# Altium PCB Advanced Clock.PcbDoc (part 1 of 7)
Units mil, origin at the board's own origin, x right, y up, seen from the top; angles counter-clockwise.
Board outline 3854 x 3880 mil, 2 copper layers (Top Layer, Bottom Layer); 117 components, 90 nets, 504 pads, 209 vias.
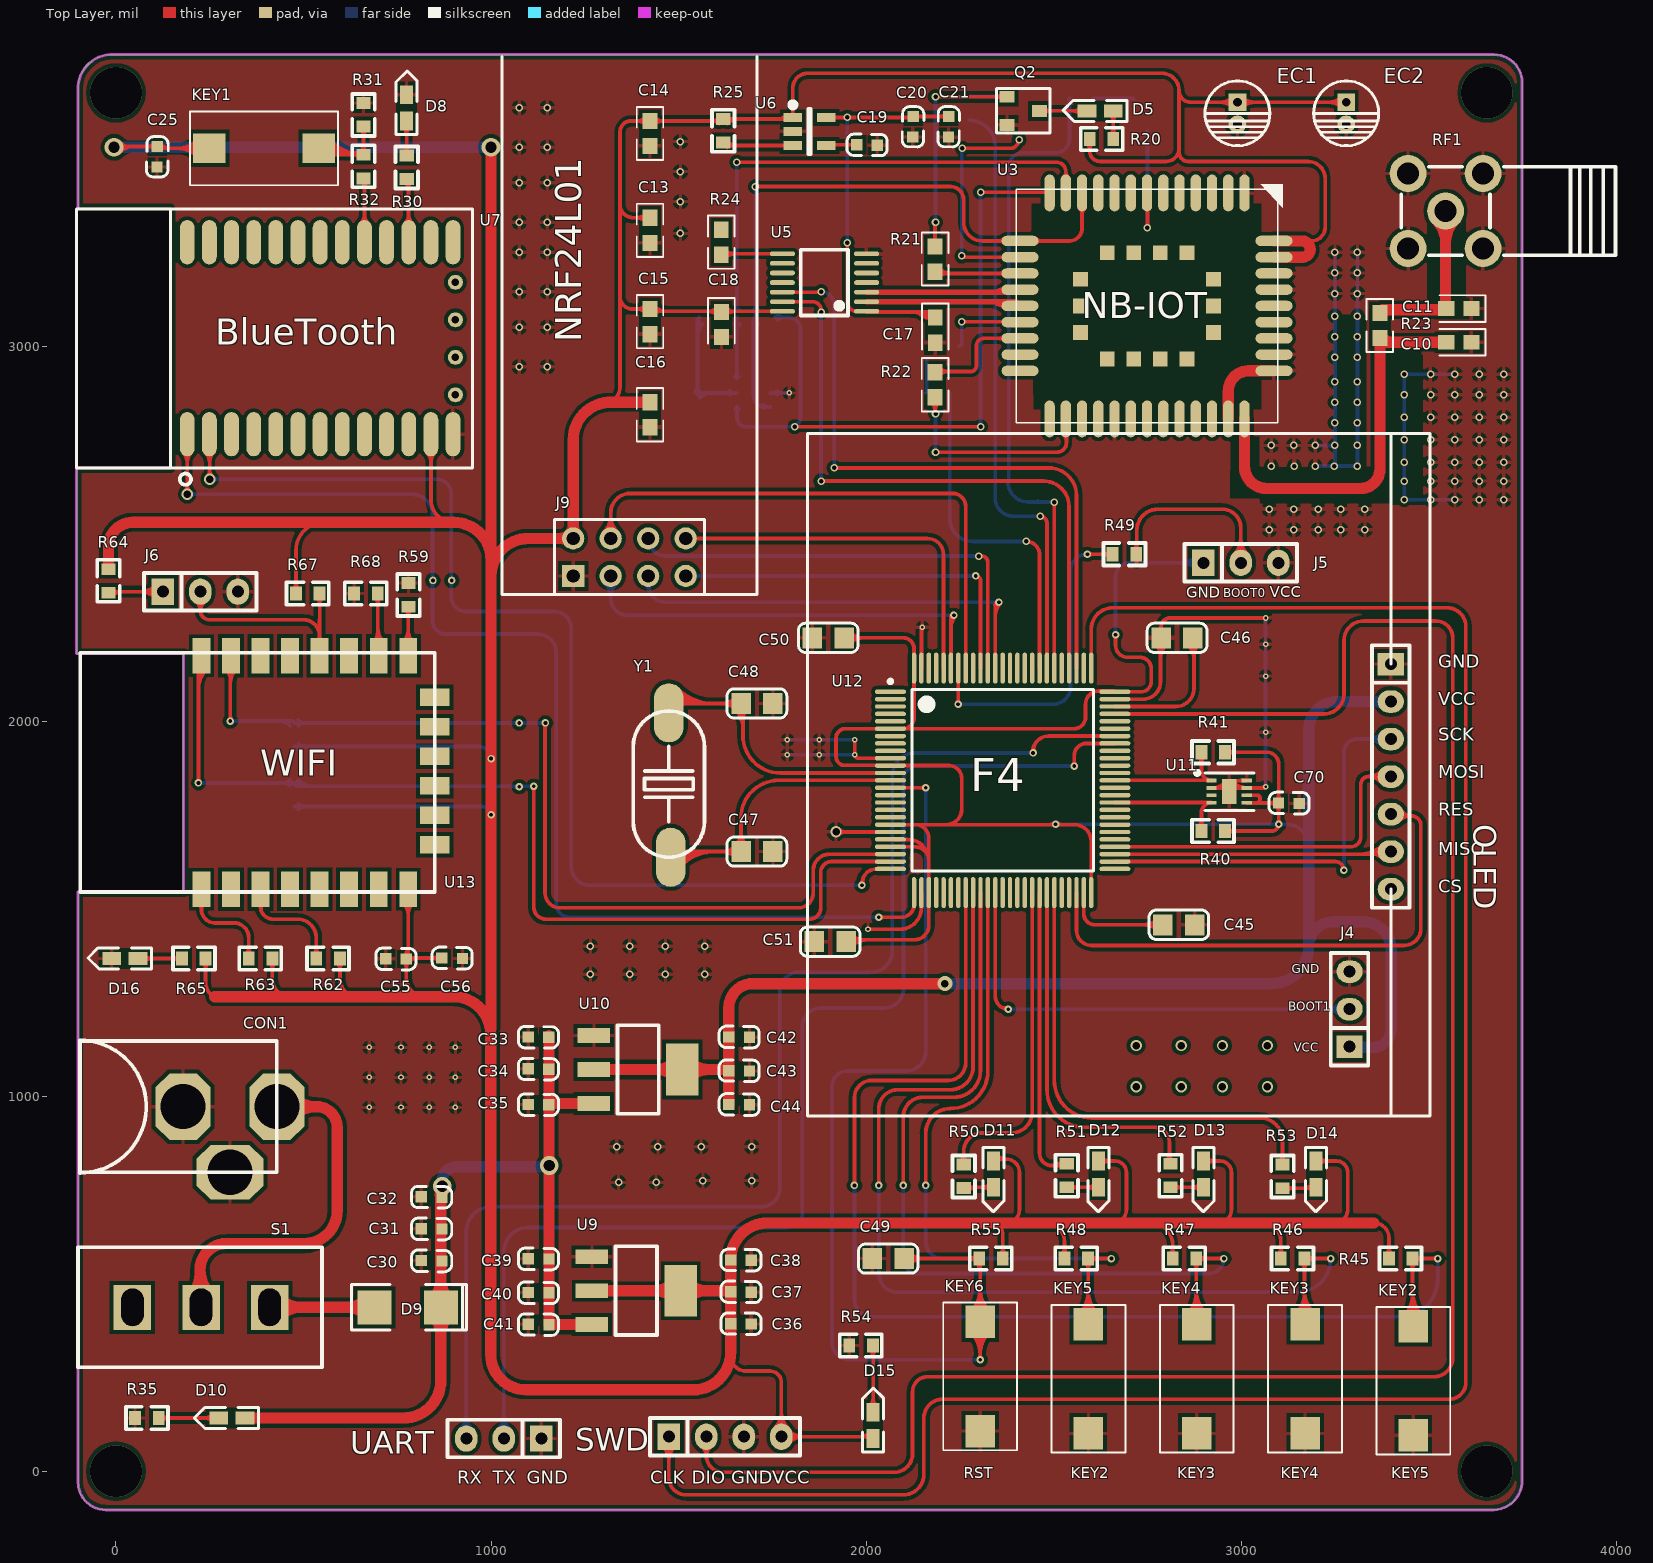
[diagram p0: Top Layer view]
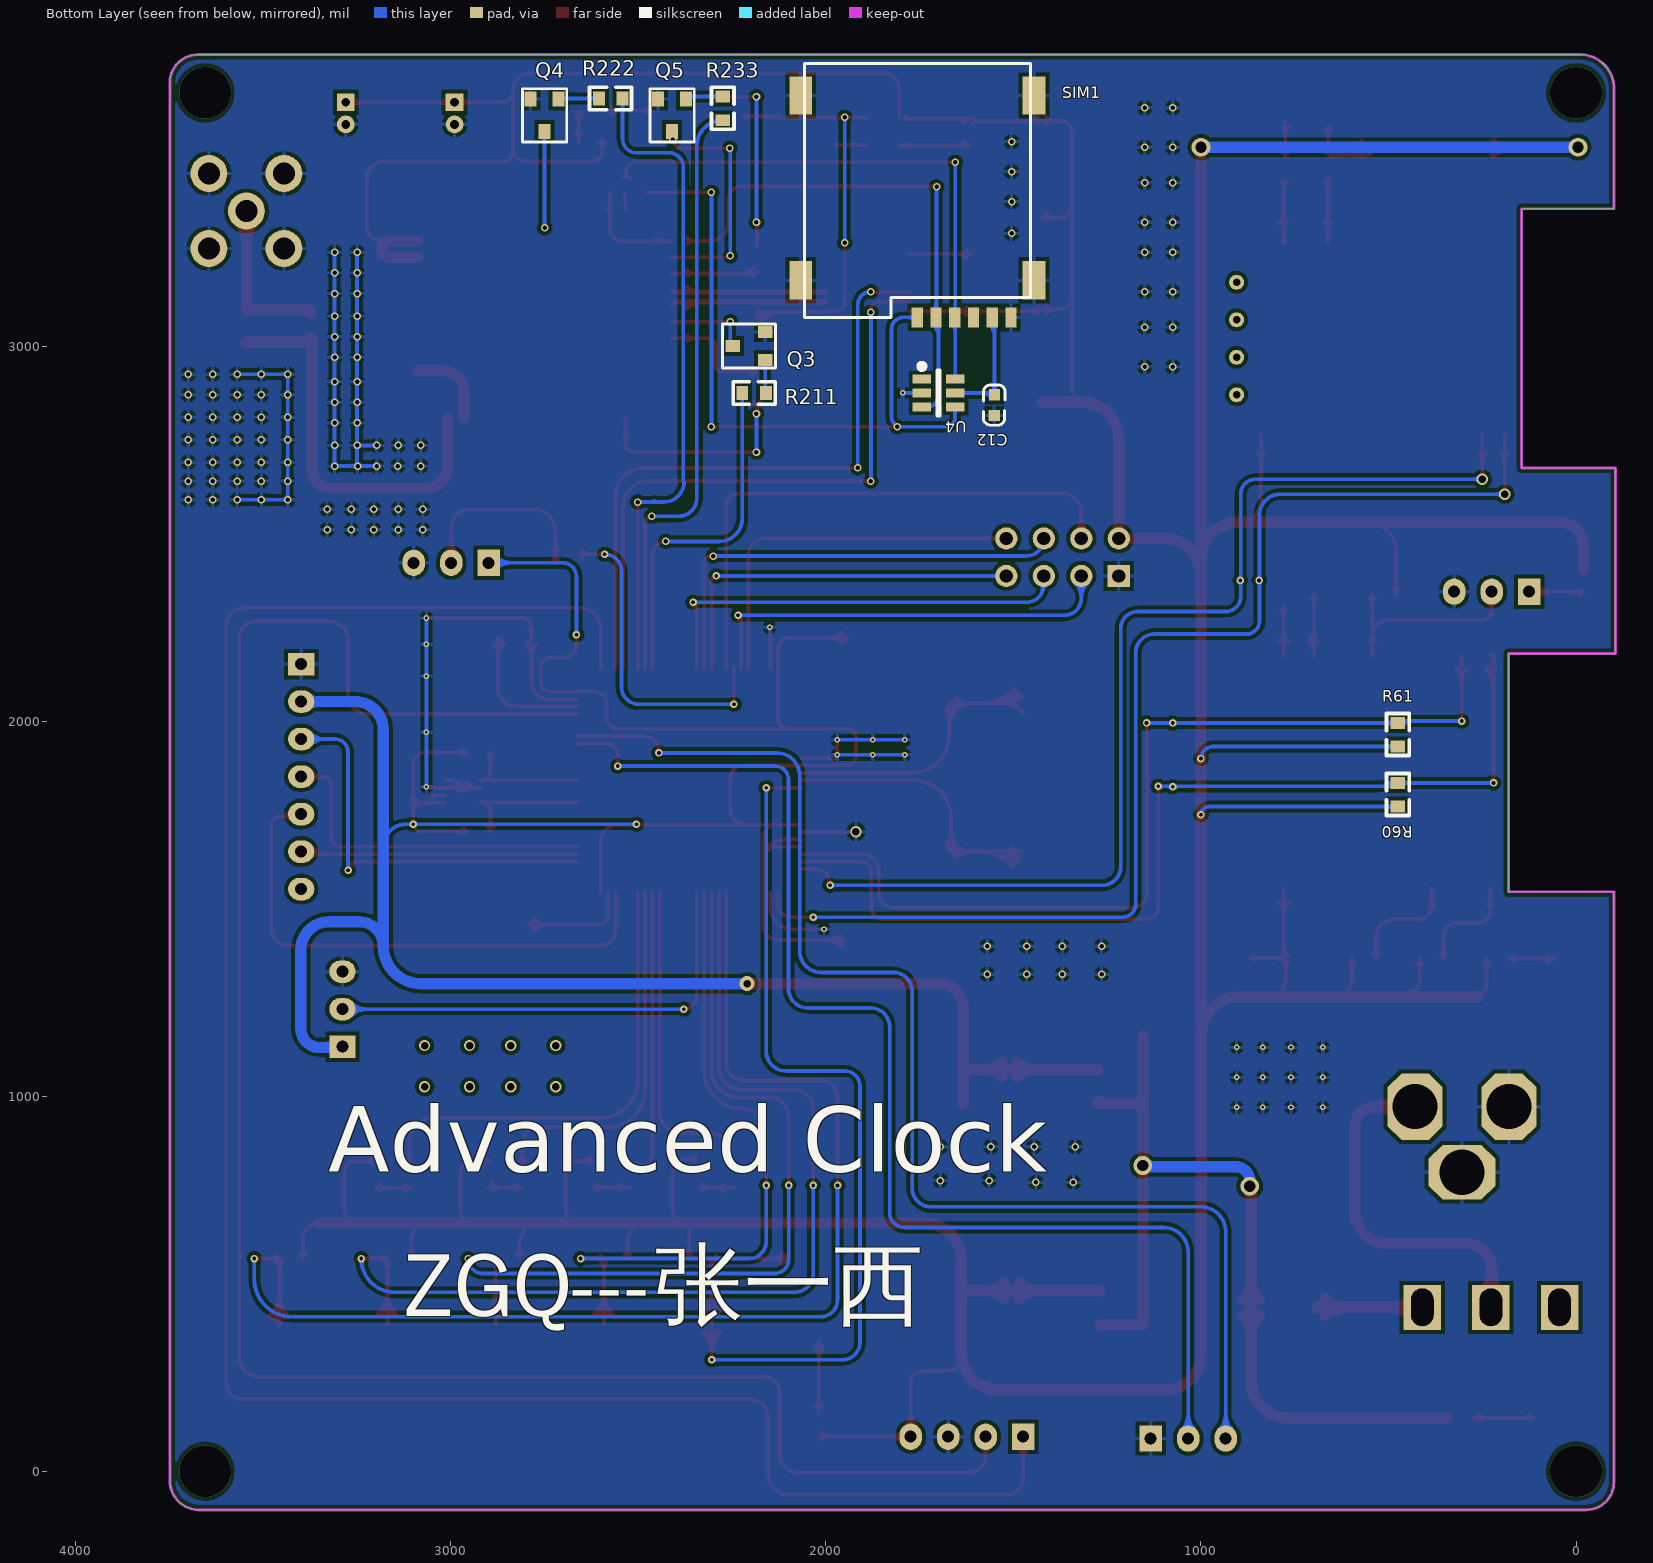
[diagram p1: Bottom Layer view, seen from below]

## Layer stack, top to bottom
Top Solder: solder mask 0.4, Solder Resist, Dk 3.5
Top Layer: signal copper 1.4
Dielectric 1: dielectric 12.6, FR-4, Dk 4.8
Bottom Layer: signal copper 1.4
Bottom Solder: solder mask 0.4, Solder Resist, Dk 3.5

## Board outline
-101,-29.41 -101,1545 180,1545 180,2180 -105,2180 -105,2675 145,2675 145,3365 144,3366 -101,3366 -101,3682 cw(c-11,3687) -16,3777 3674,3777 cw(c3674,3702) 3749,3702 3749,-23.06 3748.96,-23.06 cw(c3671.41,-25.41) 3673.76,-102.96 3673.76,-103 -27.41,-103 cw(c-27.41,-29.41)

## Design rules (kind name [scope] priority, off if disabled: settings)
Clearance [All] p1: gap=6
HoleSize [All] p1: absolutevalues=TRUE maxlimit=1000 minlimit=1 maxpercent=80.000 minpercent=20.000
MinimumSolderMaskSliver [All] p1: minsoldermaskwidth=0
PolygonConnect [All] p1: connectstyle=Relief reliefconductorwidth=10 reliefentries=4 polygonreliefangle="90 Angle" airgapwidth=10
RoutingVias [All] p1: holewidth=23.62 width=39.37 viastyle="Through Hole" minholewidth=28 minwidth=50 maxholewidth=28 maxwidth=50
SilkToSilkClearance [All] p1: silktosilkclearance=0
SilkToSolderMaskClearance [IsPad] p1: minsilkscreentomaskgap=0 clearancetoexposedcopper=TRUE
SolderMaskExpansion [All] p1: expansion=4
Width Width_1 [All] p1: maxlimit=30 minlimit=10 preferedwidth=10
Width Width_3v3_2 [InNet('VCC3V3_2')] p2: maxlimit=50 minlimit=10 preferedwidth=30
Width Width_3v3 [InNet('VCC3V3')] p3: maxlimit=50 minlimit=10 preferedwidth=30
Width [InNet('VCC5')] p4: maxlimit=50 minlimit=7.87 preferedwidth=30
25 further rules are at their usual default settings.

## Classes and differential pairs
component class STM32F407: C45 C46 C47 C48 C49 C50 C51 D11 D12 D13 D14 D15 J4 J5 KEY2 KEY3 KEY4 KEY5 KEY6 OLED R45 R46 R47 R48 R49 R50 R51 R52 R53 R54 R55 SWD U12 UART Y1
component class BT: C25 D8 KEY1 R30 R31 R32 U7
component class HT: C70 R40 R41 U11
component class NB: C10 C11 C12 C13 C14 C15 C16 C17 C18 C19 C20 C21 D5 EC1 EC2 Q2 Q3 Q4 Q5 R20 R21 R22 R23 R24 R25 R211 R222 R233 RF1 SIM1 U3 U4 U5 U6
component class NRF: J9
component class Power: C30 C31 C32 C33 C34 C35 C36 C37 C38 C39 C40 C41 C42 C43 C44 CON1 D9 D10 R35 S1 U9 U10
component class WIFI: C55 C56 D16 J6 R59 R60 R61 R62 R63 R64 R65 R67 R68 U13

## Components (designator, comment, footprint, x,y, rotation, side; value= is the part's Value field where it differs from the comment)
C10 "0.1uF" CC1608-0603 3580,3010 r180 top
C11 "0.1uF" CC1608-0603 3580,3100 r180 top
C12 "0.1uF" 0603C 1550,2870 r270 bottom
C13 "1uF" CR1608-0603 1424,3308.67 r90 top
C14 "1uF" CR1608-0603 1424,3567 r90 top
C15 "100nF" CR1608-0603 1424,3065.33 r90 top
C16 "100nF" CR1608-0603 1424,2817 r90 top
C17 "0.1uF" CC1608-0603 2184,3042 r270 top
C18 "0.1uF" CC1608-0603 1614,3057 r270 top
C19 "10nF" 0603C 2030,3535 r180 top
C20 "10nF" 0603C 2124,3557 r90 top
C21 "1uF" 0603C 2219,3557 r90 top
C25 "1uF" 0603C 109,3477 r90 top
C30 "1uF" 0603C 814,562 r0 top
C31 "1uF" 0603C 814,647 r0 top
C32 "100nF" 0603C 814,732 r0 top
C33 "100nF" 0603C 1098.79,1158.35 r0 top
C34 "1uF" 0603C 1098.79,1073.35 r0 top
C35 "1uF" 0603C 1098.79,978.35 r0 top
C36 "1uF" 0603C 1694,392 r180 top
C37 "1uF" 0603C 1694,477 r180 top
C38 "100nF" 0603C 1694,562 r180 top
C39 "100nF" 0603C 1099,567 r0 top
C40 "1uF" 0603C 1099,477 r0 top
C41 "1uF" 0603C 1099,392 r0 top
C42 "1uF" 0603C 1689.21,1156.65 r180 top
C43 "1uF" 0603C 1689.21,1066.65 r180 top
C44 "100nF" 0603C 1689.21,976.65 r180 top
C45 "4700pF" C0805 2834,1457 r90 top
C46 "4700pF" C0805 2829,2222 r270 top
C47 "22pF" C0805 1709,1652 r90 top
C48 "22pF" C0805 1709,2047 r90 top
C49 "100nF" C0805 2059,567 r270 top
C50 "4700pF" C0805 1899,2222 r90 top
C51 "4700pF" C0805 1904,1412 r90 top
C55 "1uF" 0603C 719,1367 r0 top
C56 "1uF" 0603C 924,1367 r180 top
C70 "100nF" 0603C 3155,1780 r180 top
CON1 "DC_JACK2.5mm" JACK 429,972 r0 top
D5 "LED" LED-0603G 2659,3627 r180 top
D8 "LED" LED-0603G 775,3600 r90 top
D9 "IN5822" TVS 689,437 r0 top
D10 "LED" LED-0603B 344,142 r180 top
D11 "LED" LED-0603B 2339,827 r270 top
D12 "LED" LED-0603B 2619,827 r270 top
D13 "LED" LED-0603B 2899,827 r270 top
D14 "LED" LED-0603B 3199,827 r270 top
D15 "LED" LED-0603B 2019,87 r90 top
D16 "LED" LED-0603G 59,1367 r180 top
EC1 "100uF" DIP-EC1.5X4X8 2990,3650 r270 top
EC2 "100uF" DIP-EC1.5X4X8 3280,3650 r270 top
J4 "Pin HDR1X3" "Pin HDR1X3/2.54mm-S" 3289,1132 r180 top
J5 "Pin HDR1X3" "Pin HDR1X3/2.54mm-S" 2899,2422 r90 top
J6 "Pin HDR1X3" "Pin HDR1X3/2.54mm-S" 125,2345 r90 top
J9 "Pin HDR2X4" "Pin HDR2X4/2.54mm-S" 1219,2387 r0 top
KEY1 "KEY" KEY 249,3527 r0 top
KEY2 "KEY" KEY 3459,387 r270 top
KEY3 "KEY" KEY 3170.25,392 r270 top
KEY4 "KEY" KEY 2881.5,392 r270 top
KEY5 "KEY" KEY 2592.75,392 r270 top
KEY6 "KEY" KEY 2304,107 r90 top
OLED "Pin HDR1X7" "Pin HDR1X7/2.54mm-S" 3399,2152 r0 top (schematic designator "Female HDR1X2")
Q2 "S9013" SOT-23 2419,3627 r90 top
Q3 "S9013" SOT-23 2205,3000 r270 bottom
Q4 "S9013" SOT-23 2750,3615 r180 bottom
Q5 "S9013" SOT-23 2410,3615 r180 bottom
R20 "4.7K" 0603R 2659,3552 r180 top
R21 "4.7K" CR1608-0603 2184,3232 r90 top
R22 "4.7K" CR1608-0603 2184,2897 r90 top
R23 "0R" CR1608-0603 3370,3055 r90 top
R24 "51K" CR1608-0603 1614,3277 r90 top
R25 "10K" 0603R 1619,3605.18 r270 top
R30 "1K" 0603R 775,3445 r90 top
R31 "10K" 0603R 660,3585 r90 top
R32 "220" 0603R 660,3510 r270 top
R35 "1K" 0603R 114,142 r180 top
R40 "10K" 0603R 2894,1707 r0 top
R41 "10K" 0603R 2894,1917 r0 top
R45 "10K" 0603R 3394,567 r0 top
R46 "10K" 0603R 3105.67,567 r0 top
R47 "10K" 0603R 2817.33,567 r0 top
R48 "10K" 0603R 2529,567 r0 top
R49 "10K" 0603R 2720,2445 r180 top
R50 "1K" 0603R 2260,755 r90 top
R51 "1K" 0603R 2535,757 r90 top
R52 "1K" 0603R 2811.5,757 r90 top
R53 "1K" 0603R 3110,754.5 r90 top
R54 "1K" 0603R 1955,335 r0 top
R55 "10K" 0603R 2301.5,567 r0 top
R59 "0R" 0603R 780,2305 r90 top
R60 "5.6K" 0603R 475,1835 r270 bottom
R61 "5.6K" 0603R 475,1995 r270 bottom
R62 "1K" 0603R 534,1367 r0 top
R63 "1K" 0603R 354,1367 r0 top
R64 "5.6K" 0603R -20,2405 r270 top
R65 "512" 0603R 239,1367 r180 top
R67 "1K" 0603R 480,2340 r0 top
R68 "1K" 0603R 635,2340 r0 top
R211 "4.7K" 0603R 2160,2875 r0 bottom
R222 "4.7K" 0603R 2605,3660 r180 bottom
R233 "4.7K" 0603R 2275,3665 r270 bottom
RF1 "KH-SMA-K514-N" SMA-5RF 3645,3460 r180 top
S1 "Key" Key 44,437 r90 top
SIM1 "SIM-002-A6" SIM-002-T6 1445,3175 r0 bottom locked
SWD "STLINK" "Pin HDR1X4/2.54mm-S" 1474,92 r90 top (schematic designator J11)
U3 "BC26" BC26 2749,3107 r270 top locked
U4 "SRV05-04" SOT23-6 1700,2875 r180 bottom
U5 "TXS0104E" TSSOP-14 1889,3182 r90 top
U6 "SGM2019-1.8YN5G/TR" SOT23-5 1849,3572 r0 top
U7 "HC08" HC08 190,2765 r90 top
U9 "AMS117-3.3" SOT-223 1269,572 r270 top
U10 "AMS117-3.3" SOT-223 1274.21,1161.65 r270 top
U11 "STH_DIS" DFN-8_L2.5-W2.5-P0.50-BL-EP 2969,1812 r0 top
U12 "STM32F407VET6" LQFP100_M 2364,1842 r0 top
U13 "ESP8266" ESP8266 779,2182 r270 top
UART "USART" "Pin HDR1X3/2.54mm-S" 1134,87 r270 top (schematic designator J10)
Y1 "8MHz" 49SMD 1474,1832 r270 top

## Footprints (in the part's own frame and the unit in brackets; to place one, negate y for a bottom-side part, rotate by r counter-clockwise, add the part's x,y. Pads: shape width x height; smd on the part's side, far side on the other; paste and mask are expansions set on the pad)
49SMD [mm]
  oval 4x2 smd: 1(-4.826,0) 2(4.953,0.127)
  silkscreen extent -4.95,-2.41 4.95,2.41
0603C [mil]
  rect 30x30 smd: 1(0.21,-0.35) 2(55.21,-1.35)
  silkscreen extent -26,-30 81,28, body extent -1,-15 62,17, height 12
0603R [mm]
  rect 0.8x0.965 smd: 1(0,0) 2(1.6,0)
  silkscreen extent -0.64,-0.76 2.21,0.76, body extent -0.04,-0.41 1.56,0.41, height 0.45
BC26 [mm]
  oval 2.5x0.7 smd: 1(-7.65,6.6) 2(-7.65,5.5) 3(-7.65,4.4) 4(-7.65,3.3) 5(-7.65,2.2) 6(-7.65,1.1) 7(-7.65,0) 8(-7.65,-1.1) 9(-7.65,-2.2) 10(-7.65,-3.3) 11(-7.65,-4.4) 12(-7.65,-5.5) 13(-7.65,-6.6) 23(7.65,-6.6) 24(7.65,-5.5) 25(7.65,-4.4) 26(7.65,-3.3) 27(7.65,-2.2) 28(7.65,-1.1) 29(7.65,0) 30(7.65,1.1) 31(7.65,2.2) 32(7.65,3.3) 33(7.65,4.4) 34(7.65,5.5) 35(7.65,6.6)
  oval 0.7x2.5 smd: 14(-4.4,-8.6) 15(-3.3,-8.6) 16(-2.2,-8.6) 17(-1.1,-8.6) 18(0,-8.6) 19(1.1,-8.6) 20(2.2,-8.6) 21(3.3,-8.6) 22(4.4,-8.6) 36(4.4,8.6) 37(3.3,8.6) 38(2.2,8.6) 39(1.1,8.6) 40(0,8.6) 41(-1.1,8.6) 42(-2.2,8.6) 43(-3.3,8.6) 44(-4.4,8.6)
  rect 1x1 smd: 45(-3.6,2.7) 46(-3.6,0.9) 47(-3.6,-0.9) 48(-3.6,-2.7) 49(-1.8,-4.5) 50(0,-4.5) 51(1.8,-4.5) 52(3.6,-2.7) 53(3.6,-0.9) 54(3.6,0.9) 55(3.6,2.7) 56(1.8,4.5) 57(0,4.5) 58(-1.8,4.5)
  silkscreen extent -8.25,-8.85 7.9,9.2
C0805 [mil]
  rect 56x52 smd: 1(0,-42.5) 2(0,42.5)
  silkscreen extent -39,-79 39,80
CC1608-0603 [mm]
  rect 1.1x1 smd: 1(-0.857,0.004) 2(0.843,0.004)
  silkscreen extent -1.81,-0.9 1.29,0.9
CR1608-0603 [mm]
  rect 1.1x1 smd: 1(-0.857,0.004) 2(0.843,0.004)
  silkscreen extent -1.81,-0.9 1.79,0.9
DFN-8_L2.5-W2.5-P0.50-BL-EP [mm]
  rect 0.7x0.25 smd: 1(-1.228,0.748) 2(-1.228,0.248) 3(-1.228,-0.252) 4(-1.228,-0.752) 5(1.172,-0.752) 6(1.172,-0.252) 7(1.172,0.248) 8(1.172,0.748)
  rect 1x1.7 smd: 9(-0.015,0.013)
  silkscreen extent -2.31,-1.27 1.65,1.39
DIP-EC1.5X4X8 [mm]
  rect 1.2x1.2 hole 0.6: 1(0,0)
  round 1.2 hole 0.6: 2(1.5,0)
  silkscreen extent -1.45,-2.2 2.95,2.2, body extent -1.26,-1.97 2.76,2.03, height 8.04
ESP8266 [mm]
  rect 2.4x1.2 smd: 1(0.2,0) 2(0.2,-2) 3(0.2,-4) 4(0.2,-6) 5(0.2,-8) 6(0.2,-10) 7(0.2,-12) 8(0.2,-14) 9(16,-14) 10(16,-12) 11(16,-10) 12(16,-8) 13(16,-6) 14(16,-4) 15(16,-2) 16(16,0)
  rect 1.2x2 smd: 17(13,1.8) 18(11,1.8) 19(9,1.8) 20(7,1.8) 21(5,1.8) 22(3,1.8)
  silkscreen extent 0,-22.2 16.2,1.8
HC08 [mm]
  oval 3x1 smd: 1(0,0) 2(0,-1.5) 3(0,-3) 4(0,-4.5) 5(0,-6) 6(0,-7.5) 7(0,-9) 8(0,-10.5) 9(0,-12) 10(0,-13.5) 11(0,-15) 12(0,-16.5) 13(0,-18) 14(13,-18) 15(13,-16.5) 16(13,-15) 17(13,-13.5) 18(13,-12) 19(13,-10.5) 20(13,-9) 21(13,-7.5) 22(13,-6) 23(13,-4.5) 24(13,-3) 25(13,-1.5) 26(13,0)
  round 1.016 hole 0.508: 27(2.667,-18.161) 28(5.207,-18.161) 29(7.747,-18.161) 30(10.287,-18.161)
  silkscreen extent -3.43,-19.3 15.24,7.49
JACK [mil]
  oct 145.98x177.48 hole 120.42: 1(0,0) 2(-250,0)
  oct 177.48x145.98 hole 120.42: 3(-125,-175)
  silkscreen extent -525,-177 0,177
KEY [mm]
  rect 2.2x2 smd: 1(0,0) 2(7.4,0)
  silkscreen extent -1.3,-2.5 8.7,2.5, body extent -0.41,-1.86 7.59,1.84, height 2.64
Key [mil]
  rect 120x100 hole 60 slot 100 at 0 deg: 1(0,0) 2(0,-183) 3(0,-366)
  silkscreen extent -160,-505 160,145
LED-0603B [mil]
  rect 50x35 smd: A(0,0.26) K(70,0.26)
  silkscreen extent -36,-28 135,28, body extent 4,-15 66,17, height 24
LED-0603G [mil]
  rect 50x35 smd: A(0,0.26) K(70,0.26)
  silkscreen extent -36,-28 134,28, body extent 4,-15 66,17, height 24
LQFP100_M [mm] "Thin QFP, 100-Leads, Body 14x14mm, Pitch 0.5mm, IPC Low Density"
  oval 2.1x0.3 smd: 1(-7.6,6) 2(-7.6,5.5) 3(-7.6,5) 4(-7.6,4.5) 5(-7.6,4) 6(-7.6,3.5) 7(-7.6,3) 8(-7.6,2.5) 9(-7.6,2) 10(-7.6,1.5) 11(-7.6,1) 12(-7.6,0.5) 13(-7.6,0) 14(-7.6,-0.5) 15(-7.6,-1) 16(-7.6,-1.5) 17(-7.6,-2) 18(-7.6,-2.5) 19(-7.6,-3) 20(-7.6,-3.5) 21(-7.6,-4) 22(-7.6,-4.5) 23(-7.6,-5) 24(-7.6,-5.5) 25(-7.6,-6) 51(7.6,-6) 52(7.6,-5.5) 53(7.6,-5) 54(7.6,-4.5) 55(7.6,-4) 56(7.6,-3.5) 57(7.6,-3) 58(7.6,-2.5) 59(7.6,-2) 60(7.6,-1.5) 61(7.6,-1) 62(7.6,-0.5) 63(7.6,0) 64(7.6,0.5) 65(7.6,1) 66(7.6,1.5) 67(7.6,2) 68(7.6,2.5) 69(7.6,3) 70(7.6,3.5) 71(7.6,4) 72(7.6,4.5) 73(7.6,5) 74(7.6,5.5) 75(7.6,6)
  oval 0.3x2.1 smd: 26(-6,-7.6) 27(-5.5,-7.6) 28(-5,-7.6) 29(-4.5,-7.6) 30(-4,-7.6) 31(-3.5,-7.6) 32(-3,-7.6) 33(-2.5,-7.6) 34(-2,-7.6) 35(-1.5,-7.6) 36(-1,-7.6) 37(-0.5,-7.6) 38(0,-7.6) 39(0.5,-7.6) 40(1,-7.6) 41(1.5,-7.6) 42(2,-7.6) 43(2.5,-7.6) 44(3,-7.6) 45(3.5,-7.6) 46(4,-7.6) 47(4.5,-7.6) 48(5,-7.6) 49(5.5,-7.6) 50(6,-7.6) 76(6,7.6) 77(5.5,7.6) 78(5,7.6) 79(4.5,7.6) 80(4,7.6) 81(3.5,7.6) 82(3,7.6) 83(2.5,7.6) 84(2,7.6) 85(1.5,7.6) 86(1,7.6) 87(0.5,7.6) 88(0,7.6) 89(-0.5,7.6) 90(-1,7.6) 91(-1.5,7.6) 92(-2,7.6) 93(-2.5,7.6) 94(-3,7.6) 95(-3.5,7.6) 96(-4,7.6) 97(-4.5,7.6) 98(-5,7.6) 99(-5.5,7.6) 100(-6,7.6)
  silkscreen extent -7.72,-6.15 6.15,6.82, body extent -7,-7 7,7, height 1.6
"Pin HDR1X3/2.54mm-S" [mil]
  rect 70x60 hole 32: 1(0,0)
  oval 70x60 hole 32: 2(0,-100) 3(0,-200)
  silkscreen extent -50,-250 50,50, body extent -50,-250 50,50, height 336
"Pin HDR1X4/2.54mm-S" [mil]
  rect 70x60 hole 32: 1(0,0)
  oval 70x60 hole 32: 2(0,-100) 3(0,-200) 4(0,-300)
  silkscreen extent -50,-350 50,50, body extent -50,-350 50,50, height 336
"Pin HDR1X7/2.54mm-S" [mil]
  rect 70x60 hole 32: 1(0,0)
  oval 70x60 hole 32: 2(0,-100) 3(0,-200) 4(0,-300) 5(0,-400) 6(0,-500) 7(0,-600)
  silkscreen extent -50,-650 50,50, body extent -50,-650 50,50, height 336
"Pin HDR2X4/2.54mm-S" [mm] "Connector; Header; 4x2 Position"
  rect 1.5x1.5 hole 0.9: 1(0,0)
  round 1.5 hole 0.9: 2(0,2.54) 3(2.54,0) 4(2.54,2.54) 5(5.08,0) 6(5.08,2.54) 7(7.62,0) 8(7.62,2.54)
  silkscreen extent -1.27,-1.27 8.89,3.81, body extent -1.27,-1.27 8.89,3.81, height 7.58
SIM-002-T6 [mm]
  rect 0.762x1.35 smd: 1(2.83,2.505) 2(5.37,2.505) 3(7.91,2.505) 5(1.56,2.505) 6(4.1,2.505) 7(6.64,2.505)
  rect 1.55x2.6 smd: 11(0,0) 12(0,-12.52) 13(15.8,0) 14(15.8,-12.52)
  silkscreen extent 0.25,-14.68 15.55,2.52
SMA-5RF [mm]
  round 2.5 hole 1.5: 1(0,0) 2(0,5.08) 3(5.08,5.08) 4(5.08,0) 5(2.54,2.54)
  silkscreen extent -8.96,-0.46 5.54,5.54
SOT23-5 [mm]
  rect 1.25x0.6 smd: 1(-1.125,0.95) 2(-1.125,0) 3(-1.125,-0.95) 4(1.125,-0.95) 5(1.125,0.95)
  silkscreen extent -1.25,-1.55 0.1,1.92
SOT23-6 [mm]
  rect 1.25x0.6 smd: 1(-1.125,0.95) 2(-1.125,0) 3(-1.125,-0.95) 4(1.125,-0.95) 5(1.143,0) 6(1.143,0.95)
  silkscreen extent -1.25,-1.55 0.1,1.92
SOT-23 [mm]
  rect 0.8x1 smd: 1(0.95,1.1) 2(-0.95,1.1) 3(0,-1.1)
  silkscreen extent -1.5,-1.8 1.5,1.8, body extent -1.5,-1.02 1.52,0.99, height 0.8
SOT-223 [mm]
  rect 1x2.2 smd: 1(0,0) 2(2.3,0) 3(4.6,0)
  rect 3.5x2.2 smd: 4(2.3,6)
  silkscreen extent -0.7,1.6 5.3,4.4, body extent -0.94,-0.49 5.54,6.49, height 1.64
TSSOP-14 [mm]
  oval 0.32x1.7 smd: 1(-2.275,-2.85) 2(-1.625,-2.85) 3(-0.975,-2.85) 4(-0.325,-2.85) 5(0.325,-2.85) 6(0.975,-2.85) 7(1.625,-2.85) 8(1.625,2.85) 9(0.975,2.85) 10(0.325,2.85) 11(-0.325,2.85) 12(-0.975,2.85) 13(-1.625,2.85) 14(-2.275,2.85)
  silkscreen extent -2.55,-1.6 1.9,1.6
TVS [mm]
  rect 2.3x2.3 smd: 1(0,0) 2(4.5,0)
  silkscreen extent -1.55,-1.55 6.22,1.55

## Part data
C10 C11 C12 C17 C18: library part "Cap Semi", "Capacitor (Semiconductor SIM Model)"
C13 C14 C15 C16: library part Cap_2.2uF_X7R_10%_0805, "Capacitor,2.2uF,16V, X7R,10%,0805,YAGEO"
C19 C20 C21 C25 C30 C31 C32 C33 C34 C35 C36 C37 C38 C39 C40 C41 C42 C43 C44 C70: library part CAP, "无极性电容"
C45 C46 C47 C48 C49 C50 C51: library part Cap0805, "Capacitor"
C55 C56: library part C
CON1: library part DC_JACK
D9: library part "Diode 1N4007", "1 Amp General Purpose Rectifier"
EC1 EC2: library part DIP_ECAP, "直插电解电容"
KEY6: library part KEY_1
Q2 Q3 Q4 Q5: library part NPN-normal, "Transistor"
R20 R21 R22 R23 R24 R211 R222 R233: library part Res2, "Resistor"
R25 R30 R31 R32 R35 R40 R41 R45 R46 R47 R48 R49 R50 R51 R52 R53 R54 R55 R59: library part RES
R60 R61 R62 R63 R64 R65 R67 R68: library part R
SIM1: library part SIM-002-T6
SWD: library part "Pin HDR1X4"
U5: library part TSSOP14
U12: "ARM Cortex-M4 32b MCU+FPU, 210DMIP, 512 kB Flash, 192+4 kB RAM, Camera, 82 I/Os, 100-pin LQFP, -40 to +85癈, Tray"
UART: library part "Pin HDR1X3"
Y1: library part XTAL, "Crystal Oscillator"

## Free pads (board coordinates)
  round 20 hole 10: 0(1075,1995) 1(1075,1825) 2(895,2375) 3(845,2375)

## Via types
v1: diameter 20, hole 12, Top Layer to Bottom Layer, 133 vias
v2: diameter 20, hole 10, Top Layer to Bottom Layer, 30 vias
v3: diameter 15, hole 7, Top Layer to Bottom Layer, 26 vias
v4: diameter 30, hole 20, Top Layer to Bottom Layer, 11 vias
v5: diameter 138, hole 137.8, Top Layer to Bottom Layer, 4 vias
v6: diameter 50, hole 30, Top Layer to Bottom Layer, 4 vias
v7: diameter 40, hole 20, Top Layer to Bottom Layer, 1 vias

## Nets (pads, with @x,y where several pads share a name; then routed paths per layer and width w, separated by ;. In a path a pad name is that pad's centre, name@x,y a point inside that pad or via, vN(x,y) a via of type N, cw(c..) or ccw(c..) an arc to the next point about the centre after c; other vN are vias at no path point)
BOOT0: J5.2 R49.1 | length 1342.7
  Top Layer w10: R49.1@2712.4,2455.85 ccw(c2690.43,2477.82) 2721.5,2477.82 ; R49.1@2715.2,2432.14 cw(c2710.11,2421.94) 2721.5,2421.94 cw(c2736.59,2421.94) R49.1@2726.9,2433.51 ; 2721.5,2422 2721.5,2508.2 cw(c2778.3,2508.2) 2778.3,2565 2949,2565 cw(c2949,2515) 2999,2515 J5.2@2999,2422 ; 2721.5,2470.57 ccw(c2742.33,2470.57) R49.1@2727.6,2455.85 ; J5.2@2981.32,2444.68 ccw(c2938.64,2487.36) 2999,2487.36 ; J5.2@2981.32,2444.68 ccw(c2938.64,2487.36) 2999,2487.36 ; J5.2@2981.32,2444.68 ccw(c2938.64,2487.36) 2999,2487.36 ; J5.2@2981.32,2444.68 ccw(c2938.64,2487.36) 2999,2487.36 ; J5.2@2981.32,2444.68 ccw(c2938.64,2487.36) 2999,2487.36 ; J5.2@2988.39,2437.61 ccw(c2962.79,2463.21) 2999,2463.21 ; J5.2@2988.39,2437.61 ccw(c2962.79,2463.21) 2999,2463.21 ; J5.2@2988.39,2437.61 ccw(c2962.79,2463.21) 2999,2463.21 ; J5.2@2988.39,2437.61 ccw(c2962.79,2463.21) 2999,2463.21 ; J5.2@2988.39,2437.61 ccw(c2962.79,2463.21) 2999,2463.21 ; 2999,2463.21 ccw(c3035.21,2463.21) J5.2@3009.61,2437.61 ; 2999,2463.21 ccw(c3035.21,2463.21) J5.2@3009.61,2437.61 ; 2999,2463.21 ccw(c3035.21,2463.21) J5.2@3009.61,2437.61 ; 2999,2463.21 ccw(c3035.21,2463.21) J5.2@3009.61,2437.61 ; 2999,2463.21 ccw(c3035.21,2463.21) J5.2@3009.61,2437.61 ; 2999,2487.36 ccw(c3059.36,2487.36) J5.2@3016.68,2444.68 ; 2999,2487.36 ccw(c3059.36,2487.36) J5.2@3016.68,2444.68 ; 2999,2487.36 ccw(c3059.36,2487.36) J5.2@3016.68,2444.68 ; 2999,2487.36 ccw(c3059.36,2487.36) J5.2@3016.68,2444.68 ; 2999,2487.36 ccw(c3059.36,2487.36) J5.2@3016.68,2444.68
BOOT1: J4.2 U12.37 | length 2245.5
  Top Layer w10: U12.37@2344.32,1542.79 2344.32,1266.68 ccw(c2379,1266.68) v2(2379,1232) ; 2367.34,1235.12 cw(c2364.22,1223.46) v2@2374.67,1229.5 ; 2367.34,1235.12 ccw(c2370.46,1246.78) v2@2376.5,1236.33 ; 2367.34,1235.12 cw(c2364.22,1223.46) v2@2374.67,1229.5 ; 2367.34,1235.12 ccw(c2370.46,1246.78) v2@2376.5,1236.33 ; 2367.34,1235.12 cw(c2364.22,1223.46) v2@2374.67,1229.5 ; 2367.34,1235.12 ccw(c2370.46,1246.78) v2@2376.5,1236.33 ; 2367.34,1235.12 cw(c2364.22,1223.46) v2@2374.67,1229.5 ; 2367.34,1235.12 ccw(c2370.46,1246.78) v2@2376.5,1236.33 ; 2367.34,1235.12 cw(c2364.22,1223.46) v2@2374.67,1229.5 ; 2367.34,1235.12 ccw(c2370.46,1246.78) v2@2376.5,1236.33
  Bottom Layer w10: v2(2379,1232) J4.2@3289,1232 ; v2@2382.54,1228.46 cw(c2391.07,1219.93) 2391.07,1232 ; v2@2382.54,1228.46 cw(c2391.07,1219.93) 2391.07,1232 ; v2@2382.54,1228.46 cw(c2391.07,1219.93) 2391.07,1232 ; v2@2382.54,1228.46 cw(c2391.07,1219.93) 2391.07,1232 ; v2@2382.54,1228.46 cw(c2391.07,1219.93) 2391.07,1232 ; v2@2382.54,1228.46 cw(c2391.07,1219.93) 2391.07,1232 ; v2@2382.54,1228.46 cw(c2391.07,1219.93) 2391.07,1232 ; v2@2382.54,1228.46 cw(c2391.07,1219.93) 2391.07,1232 ; v2@2382.54,1235.54 ccw(c2391.07,1244.07) 2391.07,1232 ; v2@2382.54,1235.54 ccw(c2391.07,1244.07) 2391.07,1232 ; v2@2382.54,1235.54 ccw(c2391.07,1244.07) 2391.07,1232 ; v2@2382.54,1235.54 ccw(c2391.07,1244.07) 2391.07,1232 ; v2@2382.54,1235.54 ccw(c2391.07,1244.07) 2391.07,1232 ; v2@2382.54,1235.54 ccw(c2391.07,1244.07) 2391.07,1232 ; v2@2382.54,1235.54 ccw(c2391.07,1244.07) 2391.07,1232 ; v2@2382.54,1235.54 ccw(c2391.07,1244.07) 2391.07,1232 ; 3223.64,1232 cw(c3223.64,1171.64) J4.2@3266.32,1214.32 ; 3223.64,1232 ccw(c3223.64,1292.36) J4.2@3266.32,1249.68 ; 3223.64,1232 cw(c3223.64,1171.64) J4.2@3266.32,1214.32 ; 3223.64,1232 ccw(c3223.64,1292.36) J4.2@3266.32,1249.68 ; 3223.64,1232 cw(c3223.64,1171.64) J4.2@3266.32,1214.32 ; 3223.64,1232 ccw(c3223.64,1292.36) J4.2@3266.32,1249.68 ; 3223.64,1232 cw(c3223.64,1171.64) J4.2@3266.32,1214.32 ; 3223.64,1232 ccw(c3223.64,1292.36) J4.2@3266.32,1249.68 ; 3223.64,1232 cw(c3223.64,1171.64) J4.2@3266.32,1214.32 ; 3223.64,1232 ccw(c3223.64,1292.36) J4.2@3266.32,1249.68 ; 3247.79,1232 cw(c3247.79,1195.79) J4.2@3273.39,1221.39 ; 3247.79,1232 ccw(c3247.79,1268.21) J4.2@3273.39,1242.61 ; 3247.79,1232 cw(c3247.79,1195.79) J4.2@3273.39,1221.39 ; 3247.79,1232 ccw(c3247.79,1268.21) J4.2@3273.39,1242.61 ; 3247.79,1232 cw(c3247.79,1195.79) J4.2@3273.39,1221.39 ; 3247.79,1232 ccw(c3247.79,1268.21) J4.2@3273.39,1242.61 ; 3247.79,1232 cw(c3247.79,1195.79) J4.2@3273.39,1221.39 ; 3247.79,1232 ccw(c3247.79,1268.21) J4.2@3273.39,1242.61 ; 3247.79,1232 cw(c3247.79,1195.79) J4.2@3273.39,1221.39 ; 3247.79,1232 ccw(c3247.79,1268.21) J4.2@3273.39,1242.61
BT_RXD: pad.2 U7.2 U12.25 | length 3912.4
  Top Layer w10: U7.2@249.06,2765 cw(c249.06,2764.06) 250,2764.06 v4(250,2645) ; v2@1989,1567 cw(c2027.78,1567) 2027.78,1605.78 U12.25@2064.79,1605.78 ; U7.2@238.67,2715.25 cw(c211.32,2687.9) 250,2687.9 ; U7.2@238.67,2715.25 cw(c211.32,2687.9) 250,2687.9 ; U7.2@238.67,2715.25 cw(c211.32,2687.9) 250,2687.9 ; U7.2@238.67,2715.25 cw(c211.32,2687.9) 250,2687.9 ; U7.2@238.67,2715.25 cw(c211.32,2687.9) 250,2687.9 ; v4@242.93,2652.07 ccw(c225.86,2669.14) 250,2669.14 ; v4@242.93,2652.07 ccw(c225.86,2669.14) 250,2669.14 ; v4@242.93,2652.07 ccw(c225.86,2669.14) 250,2669.14 ; v4@242.93,2652.07 ccw(c225.86,2669.14) 250,2669.14 ; v4@242.93,2652.07 ccw(c225.86,2669.14) 250,2669.14 ; 250,2669.14 ccw(c274.14,2669.14) v4@257.07,2652.07 ; 250,2669.14 ccw(c274.14,2669.14) v4@257.07,2652.07 ; 250,2669.14 ccw(c274.14,2669.14) v4@257.07,2652.07 ; 250,2669.14 ccw(c274.14,2669.14) v4@257.07,2652.07 ; 250,2669.14 ccw(c274.14,2669.14) v4@257.07,2652.07 ; 250,2692.46 cw(c282.23,2692.46) U7.2@259.44,2715.25 ; 250,2692.46 cw(c282.23,2692.46) U7.2@259.44,2715.25 ; 250,2692.46 cw(c282.23,2692.46) U7.2@259.44,2715.25 ; 250,2692.46 cw(c282.23,2692.46) U7.2@259.44,2715.25 ; 250,2692.46 cw(c282.23,2692.46) U7.2@259.44,2715.25 ; 1991.68,1577.01 ccw(c2007.61,1572.74) v2@1993.33,1564.5 ; 1991.68,1577.01 ccw(c2007.61,1572.74) v2@1993.33,1564.5 ; 1991.68,1577.01 ccw(c2007.61,1572.74) v2@1993.33,1564.5 ; 1991.68,1577.01 ccw(c2007.61,1572.74) v2@1993.33,1564.5 ; 1991.68,1577.01 ccw(c2007.61,1572.74) v2@1993.33,1564.5
  Bottom Layer w10: v4(250,2645) 854,2645 cw(c854,2605) 894,2605 894,2332 ccw(c934,2332) 934,2292 1169,2292 cw(c1169,2247) 1214,2247 1214,1612 ccw(c1264,1612) 1264,1562 v2(1989,1562) ; v4@257.07,2637.93 cw(c274.14,2620.86) 274.14,2645 ; v4@257.07,2637.93 cw(c274.14,2620.86) 274.14,2645 ; v4@257.07,2637.93 cw(c274.14,2620.86) 274.14,2645 ; v4@257.07,2637.93 cw(c274.14,2620.86) 274.14,2645 ; v4@257.07,2637.93 cw(c274.14,2620.86) 274.14,2645 ; v4@257.07,2652.07 ccw(c274.14,2669.14) 274.14,2645 ; v4@257.07,2652.07 ccw(c274.14,2669.14) 274.14,2645 ; v4@257.07,2652.07 ccw(c274.14,2669.14) 274.14,2645 ; v4@257.07,2652.07 ccw(c274.14,2669.14) 274.14,2645 ; v4@257.07,2652.07 ccw(c274.14,2669.14) 274.14,2645 ; 894,2360.51 cw(c909.49,2360.51) pad.2@898.54,2371.46 ; 894,2360.51 cw(c909.49,2360.51) pad.2@898.54,2371.46 ; 894,2360.51 cw(c909.49,2360.51) pad.2@898.54,2371.46 ; 894,2389.49 ccw(c909.49,2389.49) pad.2@898.54,2378.54 ; 894,2389.49 ccw(c909.49,2389.49) pad.2@898.54,2378.54 ; 894,2389.49 ccw(c909.49,2389.49) pad.2@898.54,2378.54 ; 1976.93,1562 cw(c1976.93,1549.93) v2@1985.46,1558.46 ; 1976.93,1562 ccw(c1976.93,1574.07) v2@1985.46,1565.54 ; 1976.93,1562 cw(c1976.93,1549.93) v2@1985.46,1558.46 ; 1976.93,1562 ccw(c1976.93,1574.07) v2@1985.46,1565.54 ; 1976.93,1562 cw(c1976.93,1549.93) v2@1985.46,1558.46 ; 1976.93,1562 ccw(c1976.93,1574.07) v2@1985.46,1565.54 ; 1976.93,1562 cw(c1976.93,1549.93) v2@1985.46,1558.46 ; 1976.93,1562 ccw(c1976.93,1574.07) v2@1985.46,1565.54 ; 1976.93,1562 cw(c1976.93,1549.93) v2@1985.46,1558.46 ; 1976.93,1562 ccw(c1976.93,1574.07) v2@1985.46,1565.54 ; 1976.93,1562 cw(c1976.93,1549.93) v2@1985.46,1558.46 ; 1976.93,1562 ccw(c1976.93,1574.07) v2@1985.46,1565.54 ; 1976.93,1562 cw(c1976.93,1549.93) v2@1985.46,1558.46 ; 1976.93,1562 ccw(c1976.93,1574.07) v2@1985.46,1565.54 ; 1976.93,1562 cw(c1976.93,1549.93) v2@1985.46,1558.46 ; 1976.93,1562 ccw(c1976.93,1574.07) v2@1985.46,1565.54
BT_TXD: pad.3 U7.1 U12.26 | length 4235.7
  Top Layer w10: v4(190,2605) U7.1@190,2765 ; v2(2034,1477) 2094,1477 ccw(c2094,1510.78) 2127.78,1510.78 U12.26@2127.78,1542.79 ; U7.1@179.62,2715.25 cw(c154.55,2690.18) 190,2690.18 ; U7.1@179.62,2715.25 cw(c154.55,2690.18) 190,2690.18 ; U7.1@179.62,2715.25 cw(c154.55,2690.18) 190,2690.18 ; U7.1@179.62,2715.25 cw(c154.55,2690.18) 190,2690.18 ; U7.1@179.62,2715.25 cw(c154.55,2690.18) 190,2690.18 ; v4@182.93,2612.07 ccw(c165.86,2629.14) 190,2629.14 ; v4@182.93,2612.07 ccw(c165.86,2629.14) 190,2629.14 ; v4@182.93,2612.07 ccw(c165.86,2629.14) 190,2629.14 ; v4@182.93,2612.07 ccw(c165.86,2629.14) 190,2629.14 ; v4@182.93,2612.07 ccw(c165.86,2629.14) 190,2629.14 ; 190,2629.14 ccw(c214.14,2629.14) v4@197.07,2612.07 ; 190,2629.14 ccw(c214.14,2629.14) v4@197.07,2612.07 ; 190,2629.14 ccw(c214.14,2629.14) v4@197.07,2612.07 ; 190,2629.14 ccw(c214.14,2629.14) v4@197.07,2612.07 ; 190,2629.14 ccw(c214.14,2629.14) v4@197.07,2612.07 ; 190,2690.18 cw(c225.45,2690.18) U7.1@200.38,2715.25 ; 190,2690.18 cw(c225.45,2690.18) U7.1@200.38,2715.25 ; 190,2690.18 cw(c225.45,2690.18) U7.1@200.38,2715.25 ; 190,2690.18 cw(c225.45,2690.18) U7.1@200.38,2715.25 ; 190,2690.18 cw(c225.45,2690.18) U7.1@200.38,2715.25 ; v2@2037.54,1473.46 cw(c2046.07,1464.93) 2046.07,1477 ; v2@2037.54,1473.46 cw(c2046.07,1464.93) 2046.07,1477 ; v2@2037.54,1473.46 cw(c2046.07,1464.93) 2046.07,1477 ; v2@2037.54,1473.46 cw(c2046.07,1464.93) 2046.07,1477 ; v2@2037.54,1473.46 cw(c2046.07,1464.93) 2046.07,1477 ; v2@2037.54,1473.46 cw(c2046.07,1464.93) 2046.07,1477 ; v2@2037.54,1473.46 cw(c2046.07,1464.93) 2046.07,1477 ; v2@2037.54,1473.46 cw(c2046.07,1464.93) 2046.07,1477 ; v2@2037.54,1480.54 ccw(c2046.07,1489.07) 2046.07,1477 ; v2@2037.54,1480.54 ccw(c2046.07,1489.07) 2046.07,1477 ; v2@2037.54,1480.54 ccw(c2046.07,1489.07) 2046.07,1477 ; v2@2037.54,1480.54 ccw(c2046.07,1489.07) 2046.07,1477 ; v2@2037.54,1480.54 ccw(c2046.07,1489.07) 2046.07,1477 ; v2@2037.54,1480.54 ccw(c2046.07,1489.07) 2046.07,1477 ; v2@2037.54,1480.54 ccw(c2046.07,1489.07) 2046.07,1477 ; v2@2037.54,1480.54 ccw(c2046.07,1489.07) 2046.07,1477
  Bottom Layer w10: v4(190,2605) 788.27,2605 cw(c788.27,2549.27) 844,2549.27 844,2267 ccw(c879,2267) 879,2232 1124,2232 cw(c1124,2182) 1174,2182 1174,1512 ccw(c1209,1512) 1209,1477 v2(2034,1477) ; v4@197.07,2597.93 cw(c214.14,2580.86) 214.14,2605 ; v4@197.07,2597.93 cw(c214.14,2580.86) 214.14,2605 ; v4@197.07,2597.93 cw(c214.14,2580.86) 214.14,2605 ; v4@197.07,2597.93 cw(c214.14,2580.86) 214.14,2605 ; v4@197.07,2597.93 cw(c214.14,2580.86) 214.14,2605 ; v4@197.07,2612.07 ccw(c214.14,2629.14) 214.14,2605 ; v4@197.07,2612.07 ccw(c214.14,2629.14) 214.14,2605 ; v4@197.07,2612.07 ccw(c214.14,2629.14) 214.14,2605 ; v4@197.07,2612.07 ccw(c214.14,2629.14) 214.14,2605 ; v4@197.07,2612.07 ccw(c214.14,2629.14) 214.14,2605 ; 844,2360.51 cw(c859.49,2360.51) pad.3@848.54,2371.46 ; 844,2360.51 cw(c859.49,2360.51) pad.3@848.54,2371.46 ; 844,2360.51 cw(c859.49,2360.51) pad.3@848.54,2371.46 ; 844,2389.49 ccw(c859.49,2389.49) pad.3@848.54,2378.54 ; 844,2389.49 ccw(c859.49,2389.49) pad.3@848.54,2378.54 ; 844,2389.49 ccw(c859.49,2389.49) pad.3@848.54,2378.54 ; 2021.93,1477 cw(c2021.93,1464.93) v2@2030.46,1473.46 ; 2021.93,1477 ccw(c2021.93,1489.07) v2@2030.46,1480.54 ; 2021.93,1477 cw(c2021.93,1464.93) v2@2030.46,1473.46 ; 2021.93,1477 ccw(c2021.93,1489.07) v2@2030.46,1480.54 ; 2021.93,1477 cw(c2021.93,1464.93) v2@2030.46,1473.46 ; 2021.93,1477 ccw(c2021.93,1489.07) v2@2030.46,1480.54 ; 2021.93,1477 cw(c2021.93,1464.93) v2@2030.46,1473.46 ; 2021.93,1477 ccw(c2021.93,1489.07) v2@2030.46,1480.54 ; 2021.93,1477 cw(c2021.93,1464.93) v2@2030.46,1473.46 ; 2021.93,1477 ccw(c2021.93,1489.07) v2@2030.46,1480.54 ; 2021.93,1477 cw(c2021.93,1464.93) v2@2030.46,1473.46 ; 2021.93,1477 ccw(c2021.93,1489.07) v2@2030.46,1480.54 ; 2021.93,1477 cw(c2021.93,1464.93) v2@2030.46,1473.46 ; 2021.93,1477 ccw(c2021.93,1489.07) v2@2030.46,1480.54 ; 2021.93,1477 cw(c2021.93,1464.93) v2@2030.46,1473.46 ; 2021.93,1477 ccw(c2021.93,1489.07) v2@2030.46,1480.54
GND: C10.1 C11.1 C12.2 C13.1 C14.1 C15.1 C16.1 C17.2 C18.2 C19.1 C20.1 C21.1 C25.1 C30.1 C31.1 C32.1 C33.1 C34.1 C35.1 C36.1 C37.1 C38.1 C39.1 C40.1 C41.1 C42.1 C43.1 C44.1 C45.1 C46.1 C47.1 C48.1 C49.1 C50.2 C51.2 C55.1 C56.1 C70.1 CON1.2 CON1.3 D8.K D16.K EC1.2 EC2.2 J4.3 J5.3 J6.3 J9.1 KEY2.2 KEY3.2 KEY4.2 KEY5.2 KEY6.1 OLED.1 Q2.2 Q3.2 Q4.2 Q5.2 R31.2 R35.2 R54.1 R59.2 R68.1 RF1.1 RF1.2 RF1.3 RF1.4 SIM1.5 SIM1.11 SIM1.12 SIM1.13 SIM1.14 SWD.3 U3.1 U3.27 U3.34 U3.36 U3.37 U3.41 U3.42 U4.2 U5.7 U6.2 U7.13 U9.1 U10.1 U11.2 U11.7 U11.8 U11.9 U12.10 U12.20 U12.27 U12.74 U12.99 UART.1 | length 7881.1
  Top Layer w10: v4(1920,1705) ccw(c1920.8,1705) 1920.8,1704.2 U12.20@2064.79,1704.2 ; v3(1970,1950) v3(1970,1910) ccw(c1978.94,1910) 1978.94,1901.06 U12.10@2064.79,1901.06 ; v3(2005,1445) 2090,1445 ccw(c2090,1502.46) 2147.46,1502.46 U12.27@2147.46,1542.79 ; U12.99@2147.46,2141.21 2147.46,2247.46 cw(c2150,2247.46) v3(2150,2250) ; U12.74@2663.21,2058.54 2738.54,2058.54 ccw(c2738.54,2105) 2785,2105 2785,2220.5 cw(c2786.5,2220.5) C46.1@2786.5,2222 2786.5,2251.5 ; U11.2@2920.65,1821.75 2959.16,1821.75 cw(c2959.16,1812.5) U11.9@2968.4,1812.5 ; U11.7@3001.89,1825.21 cw(c2999.99,1818.12) U11.7@3006.35,1821.79 ; U11.8@3015.14,1841.43 2997.33,1841.43 ccw(c2997.33,1812.5) U11.9@2968.4,1812.5 ; v3(3065,1825) cw(c3061.75,1825) 3061.75,1821.75 U11.7@3015.14,1821.75 2977.64,1821.75 ccw(c2977.64,1812.5) U11.9@2968.4,1812.5 ; v3(3065,2275) 2810,2275 ccw(c2810,2251.5) 2786.5,2251.5 ; v4@1927.07,1697.93 cw(c1942.22,1682.78) 1942.22,1704.2 ; v4@1927.07,1697.93 cw(c1942.22,1682.78) 1942.22,1704.2 ; v4@1927.07,1697.93 cw(c1942.22,1682.78) 1942.22,1704.2 ; v4@1927.07,1697.93 cw(c1942.22,1682.78) 1942.22,1704.2 ; v4@1927.07,1697.93 cw(c1942.22,1682.78) 1942.22,1704.2 ; v4@1927.07,1697.93 cw(c1942.22,1682.78) 1942.22,1704.2 ; v4@1927.07,1697.93 cw(c1942.22,1682.78) 1942.22,1704.2 ; v4@1927.07,1697.93 cw(c1942.22,1682.78) 1942.22,1704.2 ; v4@1927.07,1712.07 ccw(c1946.06,1731.06) 1946.06,1704.2 ; v4@1927.07,1712.07 ccw(c1946.06,1731.06) 1946.06,1704.2 ; v4@1927.07,1712.07 ccw(c1946.06,1731.06) 1946.06,1704.2 ; v4@1927.07,1712.07 ccw(c1946.06,1731.06) 1946.06,1704.2 ; v4@1927.07,1712.07 ccw(c1946.06,1731.06) 1946.06,1704.2 ; v4@1927.07,1712.07 ccw(c1946.06,1731.06) 1946.06,1704.2 ; v4@1927.07,1712.07 ccw(c1946.06,1731.06) 1946.06,1704.2 ; v4@1927.07,1712.07 ccw(c1946.06,1731.06) 1946.06,1704.2 ; 2147.46,2237.84 cw(c2162.16,2237.84) v3@2151.77,2248.23 ; 2147.46,2237.84 cw(c2162.16,2237.84) v3@2151.77,2248.23 ; 2147.46,2237.84 cw(c2162.16,2237.84) v3@2151.77,2248.23 ; 2147.46,2237.84 cw(c2162.16,2237.84) v3@2151.77,2248.23 ; 2147.46,2237.84 cw(c2162.16,2237.84) v3@2151.77,2248.23 ; 2147.46,2237.84 cw(c2162.16,2237.84) v3@2151.77,2248.23 ; 2147.46,2237.84 cw(c2162.16,2237.84) v3@2151.77,2248.23 ; 2147.46,2237.84 cw(c2162.16,2237.84) v3@2151.77,2248.23 ; C46.1@2771.65,2205.15 cw(c2739.42,2172.92) 2785,2172.92 ; C46.1@2771.65,2205.15 cw(c2739.42,2172.92) 2785,2172.92 ; C46.1@2771.65,2205.15 cw(c2739.42,2172.92) 2785,2172.92 ; C46.1@2771.65,2205.15 cw(c2739.42,2172.92) 2785,2172.92 ; C46.1@2771.65,2205.15 cw(c2739.42,2172.92) 2785,2172.92 ; C46.1@2771.65,2205.15 cw(c2739.42,2172.92) 2785,2172.92 ; C46.1@2771.65,2205.15 cw(c2739.42,2172.92) 2785,2172.92 ; C46.1@2771.65,2205.15 cw(c2739.42,2172.92) 2785,2172.92 ; C46.1@2780.97,2244.26 ccw(c2779,2251.5) 2786.5,2251.5 ; C46.1@2780.97,2244.26 ccw(c2779,2251.5) 2786.5,2251.5 ; C46.1@2780.97,2244.26 ccw(c2779,2251.5) 2786.5,2251.5 ; C46.1@2780.97,2244.26 ccw(c2779,2251.5) 2786.5,2251.5 ; C46.1@2780.97,2244.26 ccw(c2779,2251.5) 2786.5,2251.5 ; C46.1@2780.97,2244.26 ccw(c2779,2251.5) 2786.5,2251.5 ; C46.1@2780.97,2244.26 ccw(c2779,2251.5) 2786.5,2251.5 ; C46.1@2780.97,2244.26 ccw(c2779,2251.5) 2786.5,2251.5 ; 2785,2165.68 cw(c2840.82,2165.68) C46.1@2801.35,2205.15 ; 2785,2165.68 cw(c2840.82,2165.68) C46.1@2801.35,2205.15 ; 2785,2165.68 cw(c2840.82,2165.68) C46.1@2801.35,2205.15 ; 2785,2165.68 cw(c2840.82,2165.68) C46.1@2801.35,2205.15 ; 2785,2165.68 cw(c2840.82,2165.68) C46.1@2801.35,2205.15 ; 2785,2165.68 cw(c2840.82,2165.68) C46.1@2801.35,2205.15 ; 2785,2165.68 cw(c2840.82,2165.68) C46.1@2801.35,2205.15 ; 2785,2165.68 cw(c2840.82,2165.68) C46.1@2801.35,2205.15 ; 2785,2189.82 cw(c2816.68,2189.82) C46.1@2794.28,2212.22 ; 2785,2189.82 cw(c2816.68,2189.82) C46.1@2794.28,2212.22 ; 2785,2189.82 cw(c2816.68,2189.82) C46.1@2794.28,2212.22 ; 2785,2189.82 cw(c2816.68,2189.82) C46.1@2794.28,2212.22 ; 2785,2189.82 cw(c2816.68,2189.82) C46.1@2794.28,2212.22 ; 2785,2189.82 cw(c2816.68,2189.82) C46.1@2794.28,2212.22 ; 2785,2189.82 cw(c2816.68,2189.82) C46.1@2794.28,2212.22 ; 2785,2189.82 cw(c2816.68,2189.82) C46.1@2794.28,2212.22 ; 2786.5,2251.5 ccw(c2794,2251.5) C46.1@2792.03,2244.26 ; 2786.5,2251.5 ccw(c2794,2251.5) C46.1@2792.03,2244.26 ; 2786.5,2251.5 ccw(c2794,2251.5) C46.1@2792.03,2244.26 ; 2786.5,2251.5 ccw(c2794,2251.5) C46.1@2792.03,2244.26 ; 2786.5,2251.5 ccw(c2794,2251.5) C46.1@2792.03,2244.26 ; 2786.5,2251.5 ccw(c2794,2251.5) C46.1@2792.03,2244.26 ; 2786.5,2251.5 ccw(c2794,2251.5) C46.1@2792.03,2244.26 ; 2786.5,2251.5 ccw(c2794,2251.5) C46.1@2792.03,2244.26 ; 3051.11,1821.74 ccw(c3051.11,1838.89) v3@3063.23,1826.77 ; 3051.11,1821.74 ccw(c3051.11,1838.89) v3@3063.23,1826.77 ; 3051.11,1821.74 ccw(c3051.11,1838.89) v3@3063.23,1826.77 ; 3051.11,1821.74 ccw(c3051.11,1838.89) v3@3063.23,1826.77 ; 3051.11,1821.74 ccw(c3051.11,1838.89) v3@3063.23,1826.77 ; 3051.11,1821.74 ccw(c3051.11,1838.89) v3@3063.23,1826.77 ; 3051.11,1821.74 ccw(c3051.11,1838.89) v3@3063.23,1826.77 ; 3051.11,1821.74 ccw(c3051.11,1838.89) v3@3063.23,1826.77 ; 3056.75,1823.03 cw(c3060.09,1817.24) v3@3063.66,1822.89 ; 3056.75,1823.03 cw(c3060.09,1817.24) v3@3063.66,1822.89 ; 3056.75,1823.03 cw(c3060.09,1817.24) v3@3063.66,1822.89 ; 3056.75,1823.03 cw(c3060.09,1817.24) v3@3063.66,1822.89 ; 3056.75,1823.03 cw(c3060.09,1817.24) v3@3063.66,1822.89 ; 3056.75,1823.03 cw(c3060.09,1817.24) v3@3063.66,1822.89 ; 3056.75,1823.03 cw(c3060.09,1817.24) v3@3063.66,1822.89 ; 3056.75,1823.03 cw(c3060.09,1817.24) v3@3063.66,1822.89 ; 3056.75,1823.03 cw(c3060.09,1817.24) v3@3063.66,1822.89 ; 3056.75,1823.03 cw(c3060.09,1817.24) v3@3063.66,1822.89 ; 3056.75,1823.03 cw(c3060.09,1817.24) v3@3063.66,1822.89 ; 3056.75,1823.03 cw(c3060.09,1817.24) v3@3063.66,1822.89 ; 3056.75,1823.03 cw(c3060.09,1817.24) v3@3063.66,1822.89 ; 3056.75,1823.03 cw(c3060.09,1817.24) v3@3063.66,1822.89 ; 3056.75,1823.03 cw(c3060.09,1817.24) v3@3063.66,1822.89 ; 3056.75,1823.03 cw(c3060.09,1817.24) v3@3063.66,1822.89 ; 3056.75,1823.03 cw(c3060.09,1817.24) v3@3063.66,1822.89 ; 3056.75,1823.03 cw(c3060.09,1817.24) v3@3063.66,1822.89 ; 3056.75,1823.03 cw(c3060.09,1817.24) v3@3063.66,1822.89 ; 3056.75,1823.03 cw(c3060.09,1817.24) v3@3063.66,1822.89 ; 3056.75,1823.03 cw(c3060.09,1817.24) v3@3063.66,1822.89 ; 3056.75,1823.03 cw(c3060.09,1817.24) v3@3063.66,1822.89 ; 3056.75,1823.03 cw(c3060.09,1817.24) v3@3063.66,1822.89 ; 3056.75,1823.03 cw(c3060.09,1817.24) v3@3063.66,1822.89 ; 3056.75,1823.03 cw(c3060.09,1817.24) v3@3063.66,1822.89 ; 3056.75,1823.03 cw(c3060.09,1817.24) v3@3063.66,1822.89 ; 3056.75,1823.03 cw(c3060.09,1817.24) v3@3063.66,1822.89 ; 3056.75,1823.03 cw(c3060.09,1817.24) v3@3063.66,1822.89 ; U11.2@2921.99,1821.74 ccw(c2921.99,1872.7) 2958.02,1836.67 cw(c2921.99,1872.7) U11.2@2921.99,1821.74 ; 2943.91,1821.75 cw(c2943.91,1801.79) 2958.02,1815.9 ccw(c2943.91,1801.79) 2943.91,1821.75 ; 2946.13,1821.75 ccw(c2946.13,1848.56) 2965.09,1829.6 cw(c2946.13,1848.56) 2946.13,1821.75 ; U11.9@2971.71,1829.6 ccw(c2990.67,1848.56) 2990.67,1821.75 cw(c2990.67,1848.56) U11.9@2971.71,1829.6 ; U11.9@2978.78,1815.9 cw(c2992.89,1801.79) 2992.89,1821.75 ccw(c2992.89,1801.79) U11.9@2978.78,1815.9 ; U11.9@2978.78,1836.67 ccw(c3014.81,1872.7) 3014.81,1821.74 cw(c3014.81,1872.7) U11.9@2978.78,1836.67
  Top Layer w30: U3.34@2965.54,2805.82 2965.54,2879.82 cw(c3019.49,2879.82) 3019.49,2933.77 U3.36@3087.58,2933.77
  Bottom Layer w10: U4.2@1744.29,2875 v3(1795,2875) ; v3(1790,1910) v3(1970,1910) ; v3(1790,1950) v3(1970,1950) ; v3(3065,1825) v3(3065,2275) ; v1(3197.5,2680) v1(3248.75,2680) ; v1(3197.5,2735) v1(3250,2735) ; v1@3201.04,2676.46 cw(c3209.57,2667.93) 3209.57,2680 cw(c3209.57,2692.07) v1@3201.04,2683.54 ; v1@3201.04,2731.46 cw(c3209.57,2722.93) 3209.57,2735 cw(c3209.57,2747.07) v1@3201.04,2738.54 ; v1@3245.21,2676.46 ccw(c3236.68,2667.93) 3236.68,2680 ccw(c3236.68,2692.07) 3245.21,2683.54 ccw(c3233.66,2695.09) 3250,2695.09 ; v1@3246.46,2791.46 cw(c3237.93,2782.93) 3250,2782.93 cw(c3262.07,2782.93) v1@3253.54,2791.46 ; v1@3246.46,2798.54 ccw(c3237.93,2807.07) 3250,2807.07 ccw(c3262.07,2807.07) v1@3253.54,2798.54 ; v1@3246.46,2846.46 cw(c3237.93,2837.93) 3250,2837.93 cw(c3262.07,2837.93) v1@3253.54,2846.46 ; v1@3246.46,2853.54 ccw(c3237.93,2862.07) 3250,2862.07 ccw(c3262.07,2862.07) v1@3253.54,2853.54 ; v1@3246.46,2901.46 cw(c3237.93,2892.93) 3250,2892.93 cw(c3262.07,2892.93) v1@3253.54,2901.46 ; v1@3246.46,2908.54 ccw(c3237.93,2917.07) 3250,2917.07 ccw(c3262.07,2917.07) v1@3253.54,2908.54 ; v1@3246.46,2966.46 cw(c3237.93,2957.93) 3250,2957.93 cw(c3262.07,2957.93) v1@3253.54,2966.46 ; v1@3246.46,2973.54 ccw(c3237.93,2982.07) 3250,2982.07 ccw(c3262.07,2982.07) v1@3253.54,2973.54 ; v1@3246.46,3021.46 cw(c3237.93,3012.93) 3250,3012.93 cw(c3262.07,3012.93) v1@3253.54,3021.46 ; v1@3246.46,3028.54 ccw(c3237.93,3037.07) 3250,3037.07 ccw(c3262.07,3037.07) v1@3253.54,3028.54 ; v1@3246.46,3076.46 cw(c3237.93,3067.93) 3250,3067.93 cw(c3262.07,3067.93) v1@3253.54,3076.46 ; v1@3246.46,3083.54 ccw(c3237.93,3092.07) 3250,3092.07 ccw(c3262.07,3092.07) v1@3253.54,3083.54 ; v1@3246.46,3136.46 cw(c3237.93,3127.93) 3250,3127.93 cw(c3262.07,3127.93) v1@3253.54,3136.46 ; v1@3246.46,3143.54 ccw(c3237.93,3152.07) 3250,3152.07 ccw(c3262.07,3152.07) v1@3253.54,3143.54 ; v1@3246.46,3191.46 cw(c3237.93,3182.93) 3250,3182.93 cw(c3262.07,3182.93) v1@3253.54,3191.46 ; v1@3246.46,3198.54 ccw(c3237.93,3207.07) 3250,3207.07 ccw(c3262.07,3207.07) v1@3253.54,3198.54 ; v1@3246.46,3246.46 cw(c3237.93,3237.93) 3250,3237.93 cw(c3262.07,3237.93) v1@3253.54,3246.46 ; v1(3250,3250) v1(3250,3195) v1(3250,3140) v1(3250,3080) v1(3250,3025) v1(3250,2970) v1(3250,2905) v1(3250,2850) v1(3250,2795) v1(3250,2735) ; v1@3252.29,2676.46 cw(c3260.82,2667.93) 3260.82,2680 cw(c3260.82,2692.07) v1@3252.29,2683.54 ; v1@3253.54,2731.46 ccw(c3262.07,2722.93) 3250,2722.93 ccw(c3237.93,2722.93) 3246.46,2731.46 ccw(c3237.93,2722.93) 3237.93,2735 ccw(c3237.93,2747.07) 3246.46,2738.54 ccw(c3237.93,2747.07) 3250,2747.07 ccw(c3262.07,2747.07) v1@3253.54,2738.54 ; v1@3306.46,2676.46 ccw(c3297.93,2667.93) 3297.93,2680 ccw(c3297.93,2692.07) 3306.46,2683.54 ccw(c3297.93,2692.07) 3310,2692.07 ccw(c3322.07,2692.07) v1@3313.54,2683.54 ; v1@3306.46,2731.46 cw(c3297.93,2722.93) 3310,2722.93 cw(c3322.07,2722.93) v1@3313.54,2731.46 ; v1@3306.46,2738.54 ccw(c3297.93,2747.07) 3310,2747.07 ccw(c3322.07,2747.07) v1@3313.54,2738.54 ; v1@3306.46,2791.46 cw(c3297.93,2782.93) 3310,2782.93 cw(c3322.07,2782.93) v1@3313.54,2791.46 ; v1@3306.46,2798.54 ccw(c3297.93,2807.07) 3310,2807.07 ccw(c3322.07,2807.07) v1@3313.54,2798.54 ; v1@3306.46,2846.46 cw(c3297.93,2837.93) 3310,2837.93 cw(c3322.07,2837.93) v1@3313.54,2846.46 ; v1@3306.46,2853.54 ccw(c3297.93,2862.07) 3310,2862.07 ccw(c3322.07,2862.07) v1@3313.54,2853.54 ; v1@3306.46,2901.46 cw(c3297.93,2892.93) 3310,2892.93 cw(c3322.07,2892.93) v1@3313.54,2901.46 ; v1@3306.46,2908.54 ccw(c3297.93,2917.07) 3310,2917.07 ccw(c3322.07,2917.07) v1@3313.54,2908.54 ; v1@3306.46,2966.46 cw(c3297.93,2957.93) 3310,2957.93 cw(c3322.07,2957.93) v1@3313.54,2966.46 ; v1@3306.46,2973.54 ccw(c3297.93,2982.07) 3310,2982.07 ccw(c3322.07,2982.07) v1@3313.54,2973.54 ; v1@3306.46,3021.46 cw(c3297.93,3012.93) 3310,3012.93 cw(c3322.07,3012.93) v1@3313.54,3021.46 ; v1@3306.46,3028.54 ccw(c3297.93,3037.07) 3310,3037.07 ccw(c3322.07,3037.07) v1@3313.54,3028.54 ; v1@3306.46,3076.46 cw(c3297.93,3067.93) 3310,3067.93 cw(c3322.07,3067.93) v1@3313.54,3076.46 ; v1@3306.46,3083.54 ccw(c3297.93,3092.07) 3310,3092.07 ccw(c3322.07,3092.07) v1@3313.54,3083.54 ; v1@3306.46,3136.46 cw(c3297.93,3127.93) 3310,3127.93 cw(c3322.07,3127.93) v1@3313.54,3136.46 ; v1@3306.46,3143.54 ccw(c3297.93,3152.07) 3310,3152.07 ccw(c3322.07,3152.07) v1@3313.54,3143.54 ; v1@3306.46,3191.46 cw(c3297.93,3182.93) 3310,3182.93 cw(c3322.07,3182.93) v1@3313.54,3191.46 ; v1@3306.46,3198.54 ccw(c3297.93,3207.07) 3310,3207.07 ccw(c3322.07,3207.07) v1@3313.54,3198.54 ; v1@3306.46,3246.46 cw(c3297.93,3237.93) 3310,3237.93 cw(c3322.07,3237.93) v1@3313.54,3246.46 ; v1(3310,3250) v1(3310,3195) v1(3310,3140) v1(3310,3080) v1(3310,3025) v1(3310,2970) v1(3310,2905) v1(3310,2850) v1(3310,2795) v1(3310,2735) v1(3310,2680) v1(3248.75,2680) ; v1@3431.46,2593.54 ccw(c3422.93,2602.07) 3435,2602.07 ccw(c3447.07,2602.07) 3438.54,2593.54 ccw(c3447.07,2602.07) 3447.07,2590 ccw(c3447.07,2577.93) v1@3438.54,2586.46 ; v1@3431.46,2636.46 cw(c3422.93,2627.93) 3435,2627.93 cw(c3447.07,2627.93) v1@3438.54,2636.46 ; v1@3431.46,2643.54 ccw(c3422.93,2652.07) 3435,2652.07 ccw(c3447.07,2652.07) v1@3438.54,2643.54 ; v1@3431.46,2686.46 cw(c3422.93,2677.93) 3435,2677.93 cw(c3447.07,2677.93) v1@3438.54,2686.46 ; v1@3431.46,2693.54 ccw(c3422.93,2702.07) 3435,2702.07 ccw(c3447.07,2702.07) v1@3438.54,2693.54 ; v1@3431.46,2746.46 cw(c3422.93,2737.93) 3435,2737.93 cw(c3447.07,2737.93) v1@3438.54,2746.46 ; v1@3431.46,2753.54 ccw(c3422.93,2762.07) 3435,2762.07 ccw(c3447.07,2762.07) v1@3438.54,2753.54 ; v1@3431.46,2806.46 cw(c3422.93,2797.93) 3435,2797.93 cw(c3447.07,2797.93) v1@3438.54,2806.46 ; v1@3431.46,2813.54 ccw(c3422.93,2822.07) 3435,2822.07 ccw(c3447.07,2822.07) v1@3438.54,2813.54 ; v1@3431.46,2866.46 cw(c3422.93,2857.93) 3435,2857.93 cw(c3447.07,2857.93) v1@3438.54,2866.46 ; v1@3431.46,2873.54 ccw(c3422.93,2882.07) 3435,2882.07 ccw(c3447.07,2882.07) v1@3438.54,2873.54 ; v1@3431.46,2921.46 cw(c3422.93,2912.93) 3435,2912.93 cw(c3447.07,2912.93) 3438.54,2921.46 cw(c3447.07,2912.93) 3447.07,2925 cw(c3447.07,2937.07) v1@3438.54,2928.54 ; v1@3501.46,2586.46 ccw(c3492.93,2577.93) 3492.93,2590 ccw(c3492.93,2602.07) v1@3501.46,2593.54 ; v1@3501.46,2921.46 ccw(c3492.93,2912.93) 3492.93,2925 ccw(c3492.93,2937.07) v1@3501.46,2928.54 ; v1@3508.54,2586.46 cw(c3517.07,2577.93) 3517.07,2590 cw(c3517.07,2602.07) v1@3508.54,2593.54 ; v1@3508.54,2921.46 cw(c3517.07,2912.93) 3517.07,2925 cw(c3517.07,2937.07) v1@3508.54,2928.54 ; v1@3566.46,2586.46 ccw(c3557.93,2577.93) 3557.93,2590 ccw(c3557.93,2602.07) v1@3566.46,2593.54 ; v1@3566.46,2921.46 ccw(c3557.93,2912.93) 3557.93,2925 ccw(c3557.93,2937.07) v1@3566.46,2928.54 ; v1(3570,2590) v1(3505,2590) v1(3435,2590) v1(3435,2640) v1(3435,2690) v1(3435,2750) v1(3435,2810) v1(3435,2870) v1(3435,2925) v1(3505,2925) v1(3570,2925) ; U4.2@1761.9,2870.18 cw(c1773.53,2858.56) 1773.53,2875 ; U4.2@1761.9,2870.18 cw(c1773.53,2858.56) 1773.53,2875 ; U4.2@1761.9,2870.18 cw(c1773.53,2858.56) 1773.53,2875 ; U4.2@1761.9,2870.18 cw(c1773.53,2858.56) 1773.53,2875 ; U4.2@1761.9,2870.18 cw(c1773.53,2858.56) 1773.53,2875 ; U4.2@1761.9,2870.18 cw(c1773.53,2858.56) 1773.53,2875 ; U4.2@1761.9,2870.18 cw(c1773.53,2858.56) 1773.53,2875 ; U4.2@1761.9,2870.18 cw(c1773.53,2858.56) 1773.53,2875 ; U4.2@1761.9,2879.82 ccw(c1773.53,2891.44) 1773.53,2875 ; U4.2@1761.9,2879.82 ccw(c1773.53,2891.44) 1773.53,2875 ; U4.2@1761.9,2879.82 ccw(c1773.53,2891.44) 1773.53,2875 ; U4.2@1761.9,2879.82 ccw(c1773.53,2891.44) 1773.53,2875 ; U4.2@1761.9,2879.82 ccw(c1773.53,2891.44) 1773.53,2875 ; U4.2@1761.9,2879.82 ccw(c1773.53,2891.44) 1773.53,2875 ; U4.2@1761.9,2879.82 ccw(c1773.53,2891.44) 1773.53,2875 ; U4.2@1761.9,2879.82 ccw(c1773.53,2891.44) 1773.53,2875 ; v1(3248.75,2680) ccw(c3248.75,2681.25) 3250,2681.25 v1(3250,2735)
  other v1: 1340,770 1440,770 1565,775 1695,775 1335,865 1445,865 1560,865 1695,865 1265,1325 1370,1325 1465,1325 1570,1325 1265,1400 1370,1400 1465,1400 1570,1400 3075,2510 3140,2510 3205,2510 3265,2510 3330,2510 3075,2565 3140,2565 3205,2565 3265,2565 3330,2565 3635,2590 3700,2590 3505,2640 3570,2640 3635,2640 3700,2640 3080,2680 3141.25,2680 3505,2690 3570,2690 3635,2690 3700,2690 3080,2735 3140,2735 3505,2750 3570,2750 3635,2750 3700,2750 3505,2810 3570,2810 3635,2810 3700,2810 3505,2870 3570,2870 3635,2870 3700,2870 3635,2925 3700,2925 1075,2945 1150,2945 1075,3050 1150,3050 1075,3145 1150,3145 1075,3250 1150,3250 1505,3300 1075,3330 1150,3330 1505,3385 1075,3435 1150,3435 1505,3465 1075,3530 1150,3530 1505,3545 1075,3635 1150,3635
  other v3: 675,970 760,970 835,970 905,970 675,1050 760,1050 835,1050 905,1050 675,1130 760,1130 835,1130 905,1130 1875,1910 1875,1950 3065,1970 3065,2120 3065,2205